# Altium PCB Sensor_Box_CAN_SENS.PCBDOC (part 2 of 2)
Units mm, origin at the board's own origin, x right, y up, seen from the top; angles counter-clockwise.
Board outline 78 x 49 mm, 2 copper layers (Top, Bot), stack 1.571 mm thick; 70 components, 54 nets, 293 pads, 158 vias.
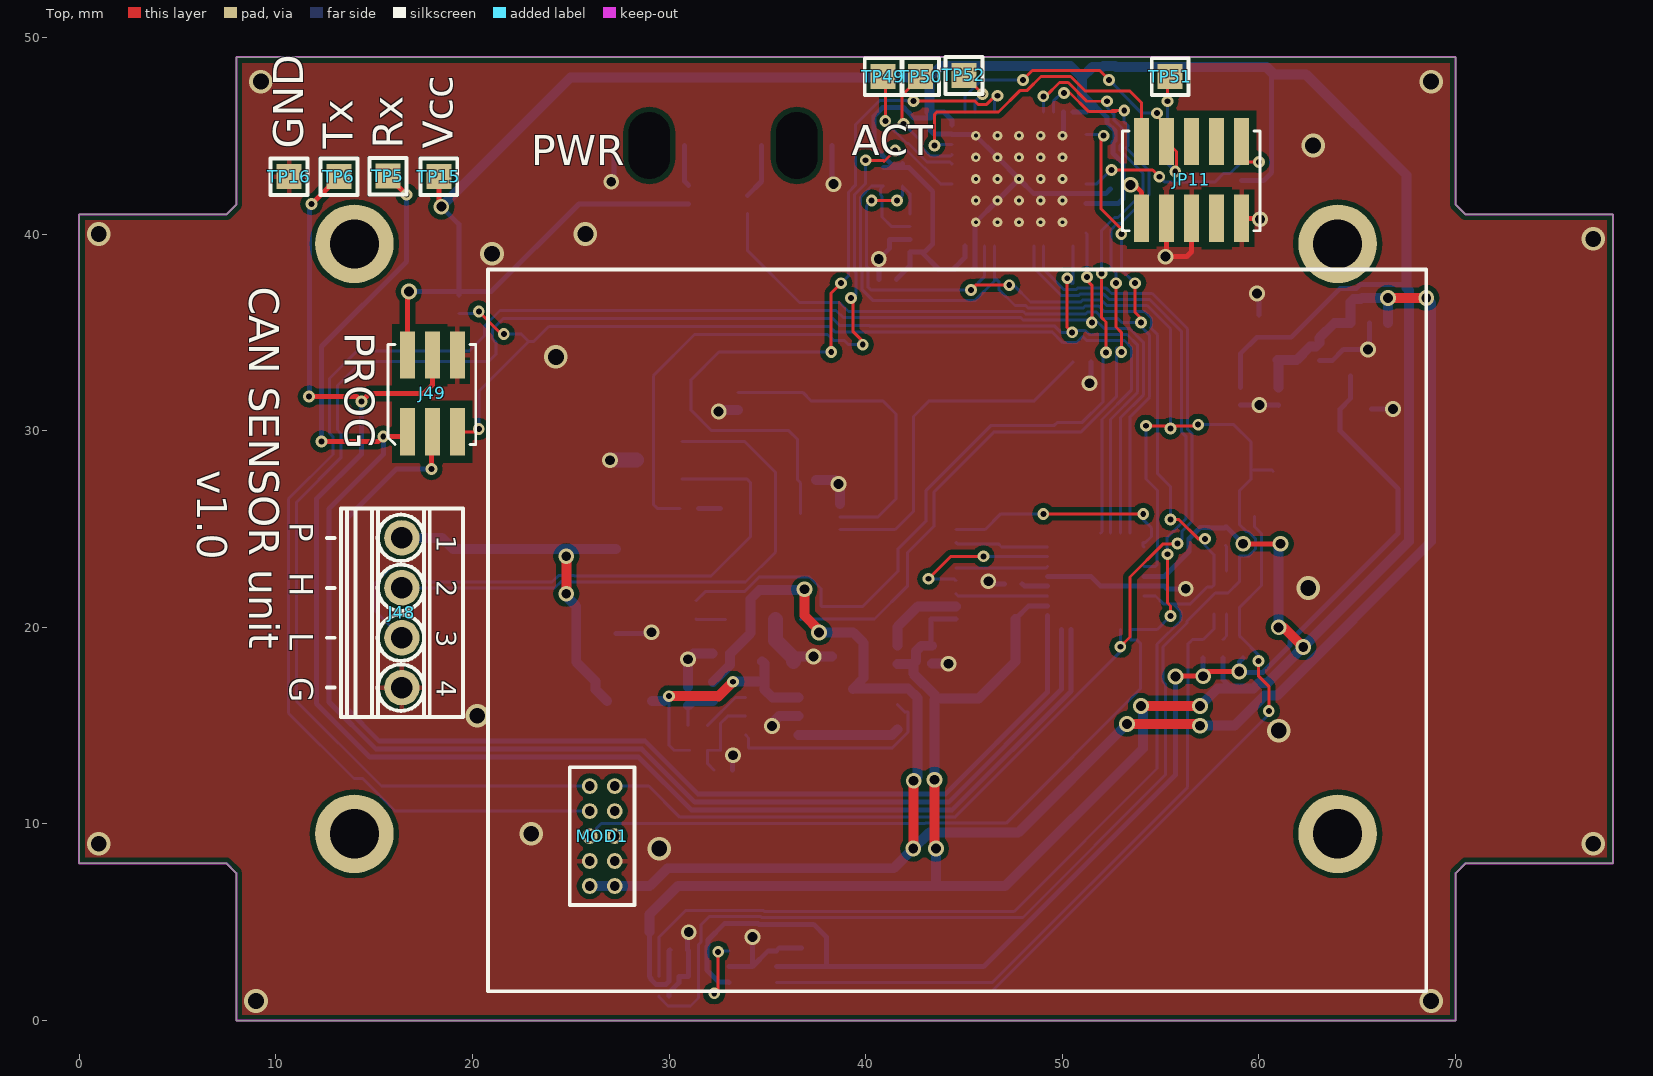
[diagram p0: Top view]

## Via types
v1: diameter 0.6, hole 0.3, Top to Bot, tented both sides, 69 vias
v2: diameter 0.8, hole 0.5, Top to Bot, tented both sides, 47 vias
v3: diameter 0.5, hole 0.2, Top to Bot, tented both sides, 25 vias
v4: diameter 1.2, hole 0.8, Top to Bot, tented both sides, 17 vias

## Nets (pads, with @x,y where several pads share a name; then routed paths per layer and width w, separated by ;. In a path a pad name is that pad's centre, name@x,y a point inside that pad or via, vN(x,y) a via of type N, cw(c..) or ccw(c..) an arc to the next point about the centre after c; other vN are vias at no path point) (continued)
PROG_MISO: (continued)
  Top w0.254: v1(12.33,29.453) 15.215,29.453 v1(15.469,29.707) 16.464,29.707 J49.1 ; TP5.1 v1(16.648,42.001)
  Bot w0.254: v1(12.33,29.453) 12.33,34.279 16.648,38.597 v1(16.648,42.001) ; v1(15.469,29.707) 15.471,29.705 15.471,28.784 12.711,26.024 12.711,16.202 15.106,13.807 28.619,13.807 31.317,11.108 44.217,11.108 49.95,16.841 IC38.16
PROG_MOSI: IC38.15 J49.4 TP6.1 | length 82.6
  Top w0.254: v1(11.695,31.739) 14.108,31.739 v1(14.362,31.485) 14.768,31.891 17.534,31.891 17.969,32.326 J49.4 ; v1(11.822,41.518) TP6.1
  Bot w0.254: v1(11.695,31.739) 11.721,31.765 11.721,41.417 v1(11.822,41.518) ; v1(14.362,31.485) 14.362,28.818 12.076,26.532 12.076,16.118 14.794,13.4 28.45,13.4 31.149,10.701 44.385,10.701 50.45,16.767 IC38.15
PROG_SCK: IC38.17 J49.3 | length 60.4
  Top w0.254: v1(17.918,28.056) 17.918,29.891 J49.3
  Bot w0.254: v1(17.918,28.056) 16.14,28.056 13.618,25.534 13.618,15.87 15.275,14.213 28.787,14.213 31.486,11.514 44.048,11.514 49.25,16.716 IC38.17
REL1: IC104.20
REL2: IC104.39
RESETn: IC38.29 J49.5 R138.2 | length 52.6
  Top w0.152: J49.5 20.184,29.941 v1(20.331,30.088) ; v1(20.331,36.057) 21.474,34.914 v1(21.601,34.914)
  Bot w0.152: R138.2 20.242,35.968 v1(20.331,36.057) ; v1(20.331,30.088) 20.331,31.993 22.871,34.533 ; v1(21.601,34.914) 22.49,34.914 22.871,34.533 ; IC38.29 52.021,24.862 52.021,30.573 53.528,32.081 53.528,34.219 53.162,34.586 51.236,34.586 51.034,34.787 50.725,34.478 50.719,34.471 50.021,34.471 49.469,35.023 38.433,35.023 38.159,35.298 23.89,35.298 23.125,34.533 22.871,34.533
Rx: IC104.38 TP52.1 | length 2.4
  Top w0.152: TP52.1 v1(45.935,47.126)
  Bot w0.152: IC104.38 45.55,46.753 45.562,46.753 v1(45.935,47.126)
SCL: IC29.6 IC38.6 IC39.A1 IC104.21 R217.1 T7.1 | length 87.7
  Top w0.152: v1(55.5,25.476) 55.931,25.476 56.907,24.5 v1(57.25,24.5)
  Bot w0.152: IC39.A1 29.5,4.25 30.84,5.59 34.805,5.59 34.84,5.555 47.555,5.555 54.817,12.817 54.817,19.135 56.034,20.352 56.034,20.79 55.625,21.198 55.133,21.198 ; IC29.6 41.326,40.374 40.834,40.867 40.834,41.918 40.75,42.002 40.75,42.29 R217.1 40.298,42.44 39.733,41.874 39.733,38.229 39.823,38.139 39.823,37.165 40.359,36.628 45.574,36.628 46.55,37.605 46.55,37.8 ; IC104.21 46.55,37.8 ; IC38.6 54.74,21.591 55.133,21.198 ; v1(55.5,25.476) 55.5,27.155 54.849,27.806 54.849,34.872 54.485,35.237 54.528,35.281 54.528,35.719 54.19,36.057 52.127,36.057 51.851,36.333 51.155,36.333 51.064,36.243 48.257,36.243 48.138,36.362 47.589,36.362 46.771,37.18 46.771,37.579 46.55,37.8 ; v1(57.25,24.5) 57.25,24.157 57.699,23.708 T7.1 57.699,22.146 57.608,22.055 57.373,22.055 56.516,21.198 55.133,21.198
SCL1: IC40.6 R139.2 T7.6 | length 34.7
  Bot w0.152: IC40.6 46.45,1.95 56.371,11.871 56.371,16.26 56.399,16.288 56.399,19.166 56.615,19.382 R139.2 57.699,19.92 T7.6
SDA: D30.3 IC29.5 IC38.3 IC39.A2 IC104.22 R215.1 T7.3 | length 100.5
  Top w0.152: v1(40.305,41.699) v1(41.6,41.699) ; v1(45.355,37.157) 45.596,37.399 v1(47.3,37.399) ; v1(54.25,30.25) 56.852,30.25 v1(56.907,30.305)
  Bot w0.152: IC39.A2 29.5,1.205 29.955,0.75 31.095,0.75 31.5,1.155 31.5,3.861 31.629,3.99 31.629,4.879 32.035,5.285 34.679,5.285 34.714,5.25 48,5.25 55.25,12.5 55.25,17.111 55.121,17.24 55.121,19.009 56.338,20.226 56.338,20.308 57.78,21.75 58.429,21.75 58.999,22.32 T7.3 58.999,23.617 59.453,23.617 59.822,23.986 59.822,24.506 59.446,24.882 59.347,24.882 58.999,25.23 58.999,26.934 59.594,27.529 59.594,28.012 ; v1(40.305,41.699) 40.038,41.432 40.038,38.356 40.128,38.266 40.128,37.291 40.261,37.157 v1(45.355,37.157) 46.05,37.852 IC104.22 ; v1(41.6,41.699) 41.866,41.965 R215.1 42.25,42.056 IC29.5 ; v1(47.3,37.399) 47.532,37.399 48.383,36.547 50.938,36.547 51.028,36.638 51.977,36.638 52.253,36.362 54.317,36.362 55.5,35.179 v1(55.5,30.112) ; IC38.3 54.74,23.091 54.816,23.168 54.816,23.936 54.833,23.953 54.833,26.955 54.25,27.538 v1(54.25,30.25) ; v1(56.907,30.305) 58.722,30.305 59.594,29.433 59.594,28.012 ; D30.3 60.641,28.012 59.594,28.012
SDA1: D30.2 IC40.3 R141.2 T7.4 | length 48.3
  Top w0.152: v1(32.3,1.39) 32.5,1.59 v1(32.5,3.5) ; v1(59.968,18.295) 59.968,17.535 60.5,17.003 v1(60.5,15.75)
  Bot w0.152: v1(32.3,1.39) 32.406,1.496 46.427,1.496 60.5,15.569 v1(60.5,15.75) ; v1@32.35,3.55 IC40.3 ; D30.2 59.767,25.119 60.126,24.76 60.126,22.126 58.999,20.999 T7.4 58.999,19.576 R141.2 59.968,18.607 v1(59.968,18.295)
SENS2_Rx: IC38.31 IC104.12 MOD1.7 | length 94.1
  Top w0.152: v1(51.247,37.816) 51.247,37.651 51.5,37.399 v1(51.5,35.5)
  Bot w0.152: MOD1.7@26.173,10.657 MOD1.7 16.073,10.657 14.422,12.308 13.981,12.308 10.654,15.635 10.654,26.532 12.909,28.788 12.909,29.693 12.736,29.866 12.736,32.653 14.124,34.041 19.829,34.041 20.615,34.828 20.615,35.322 21.403,36.11 38.495,36.11 38.854,35.752 47.885,35.752 48.004,35.633 51.367,35.633 v1(51.5,35.5) ; IC104.12 51.247,40.002 v1(51.247,37.816) ; v1@51.692,35.63 52.127,35.195 53.414,35.195 54.138,34.471 54.138,31.828 52.95,30.64 IC38.31
SENS2_Set: IC38.10 IC104.16 MOD1.10 | length 59
  Top w0.152: v1(52.95,19.011) 53.445,19.506 53.445,22.565 55.126,24.246 55.839,24.246 v1(55.86,24.267)
  Bot w0.152: MOD1.10 28.967,11.927 30.548,10.346 44.532,10.346 52.95,18.764 v1(52.95,19.011) IC38.10 ; IC104.16 49.05,38.202 50.086,37.166 50.694,37.166 50.776,37.248 52.23,37.248 52.506,36.971 54.569,36.971 56.359,35.181 56.359,30.069 56.583,29.845 56.583,25.38 56.078,24.875 56.078,24.485 v1(55.86,24.267)
SENS2_Tx: IC38.30 IC104.13 MOD1.9 | length 93
  Top w0.152: v1(50.25,37.75) 50.25,35.25 v1(50.5,35)
  Bot w0.152: MOD1.9@25.97,12.105 MOD1.9 15.378,11.927 11.06,16.245 11.06,26.364 13.316,28.619 13.316,29.861 13.143,30.034 13.143,32.298 14.362,33.517 20.839,33.517 21.195,33.873 21.195,34.501 21.022,34.674 21.022,35.154 21.572,35.704 38.327,35.704 38.673,35.358 39.827,35.358 40.174,35.358 40.203,35.328 49.596,35.328 49.924,35 v1(50.5,35) 50.592,35.092 51.161,35.092 51.362,34.89 53.288,34.89 53.833,34.345 53.833,31.954 52.45,30.571 IC38.30 ; v1(50.25,37.75) 50.25,37.721 50.5,37.471 50.55,37.521 IC104.13
SENS_RESET: IC38.9 IC104.17 MOD1.5 | length 62
  Top w0.152: v1(55.345,23.717) 55.345,21.25 55.505,21.09 v1(55.505,20.571)
  Bot w0.152: MOD1.5 25.97,9.438 26.56,10.028 43.025,10.028 43.038,10.041 47.147,10.041 53.967,16.861 53.967,19.185 53.788,19.364 53.479,19.364 53.479,19.862 IC38.9 54.825,19.891 v1(55.505,20.571) ; IC104.17 48.55,38.271 49.96,36.861 50.82,36.861 50.902,36.943 52.103,36.943 52.38,36.667 54.443,36.667 56.048,35.062 56.048,29.949 56.278,29.719 56.278,25.506 55.314,24.542 55.314,24.031 55.345,24 v1(55.345,23.717)
SWCLK: IC104.37 JP11.4 R441.1 | length 16.6
  Top w0.152: v1(48,47.837) 48.472,48.309 51.908,48.309 v1(52.38,47.837) ; v1(54.81,46.145) 54.81,46.003 55.305,45.509 JP11.4 55.805,44.2 55.805,43.247 v1(55.743,43.185)
  Bot w0.152: IC104.37 45.05,46.989 45.899,47.837 v1(48,47.837) ; v1(52.38,47.837) 52.903,47.314 52.903,47.279 54.037,46.145 v1(54.81,46.145) ; R441.1 55.305,43.623 v1(55.743,43.185)
SWDIO: IC104.34 JP11.2 | length 16.4
  Top w0.152: v1(43.5,44.5) 43.5,46.088 43.611,46.199 46.751,46.199 47.86,47.309 48.219,47.309 48.915,48.004 50.424,48.004 51.15,47.279 53.421,47.279 54.035,46.664 JP11.2
  Bot w0.152: v1(43.5,44.5) 43.549,44.549 IC104.34
Tx: R441.2 TP51.1 | length 2.9
  Top w0.152: v1(55.345,46.75) 55.345,47.862 TP51.1
  Bot w0.152: R441.2 55.339,45.204 55.339,46.744 v1(55.345,46.75)
pads on no net: D30.1 IC35.3 IC35.4 IC35.5 IC35.6 IC35.7 IC35.11 IC35.12 IC35.15 IC37.4 IC38.2 IC38.7 IC38.8 IC38.11 IC38.12 IC38.13 IC38.14 IC38.25 IC38.26 IC38.27 IC38.28 IC39.C2 IC39.D2 IC104.1 IC104.3 IC104.4 IC104.5 IC104.6 IC104.10 IC104.11 IC104.14 IC104.15 IC104.18 IC104.19 IC104.25 IC104.26 IC104.27 IC104.28 IC104.29 IC104.31 IC104.41 IC104.42 IC104.43 IC104.44 JP11.6 JP11.7 JP11.8 LD10.3 LD13.3 MOD1.6 MOD1.8

## Polygon pours and split planes (outlines as drawn)
GND on Top "Signal Layer 1-No Net 1" (solid, remove dead copper, pour order 0): 8,49 8.25,48.75 70,48.75 70,41.5 70.5,41 78,41 78,8.25 77.75,8 70.5,8 70,7.5 70,0 8.25,0 8,0.25 8,7.5 7.5,8 0,8 0,40.75 0.25,41 7.5,41 8,41.5
GND on Bot "Signal Layer 1-No Net 1" (solid, remove dead copper, pour order 2): 8,49 8.25,48.75 70,48.75 70,41.5 70.5,41 78,41 78,8.25 77.75,8 70.5,8 70,7.5 70,0 8.25,0 8,0.25 8,7.5 7.5,8 0,8 0,40.75 0.25,41 7.5,41 8,41.5

## Keep-outs
KeepOutLayer:
  lines w0.1: 0,8 0,41 7.5,41 8,41.5 8,49 70,49 70,41.5 70.5,41 78,41 78,8 70.5,8 70,7.5 70,0 8,0 8,7.5 7.5,8 0.25,8 0,8

## Silkscreen, mask and mechanical layers (free items; w line width, h text height)
TopOverlay:
  text "GND" at 11.39,44.328 h1.52 r90
  text "Tx" at 13.93,44.328 h1.52 r90
  text "Rx" at 16.47,44.328 h1.52 r90
  text "Vcc" at 19.01,44.328 h1.52 r90
  text "ACT" at 39.3,44 h1.52
  text "PWR" at 23,43.5 h1.52
  text "CAN SENSOR unit" at 8.647,37.327 h1.52 r270
  text "PROG" at 13.5,35 h1.52 r270
  text "v1.0" at 6,28 h1.52 r270
  text "P" at 10.728,25.338 h1.2 r270
  text "H" at 10.728,22.798 h1.2 r270
  text "L" at 10.728,19.75 h1.2 r270
  text "G" at 10.728,17.464 h1.2 r270
Mechanical1:
  lines w0.254: 8,41.5 7.5,41 0,41 0,8 7.5,8 8,7.5 8,0 70,0 70,7.5 70.5,8 78,8 78,41 70.5,41 70,41.5 70,49 8,49 8,41.5 ; 8,41.5 8,41.5
Mechanical4:
  circle w0.254: c4.5,44.5 r3
  circle w0.254: c73.5,44.5 r3
  circle w0.254: c73.5,4.5 r3
  circle w0.254: c4.5,4.5 r3
  circle w0.013: c86.5,13.1 r1.65
  circle w0.013: c86.5,13.1 r3.4
  circle w0.013: c-8.5,13.1 r1.65
  circle w0.013: c-8.5,13.1 r3.4
  circle w0.013: c86.5,35.9 r1.65
  circle w0.013: c86.5,35.9 r3.4
  circle w0.013: c-8.5,35.9 r1.65
  circle w0.013: c-8.5,35.9 r3.4
  lines w0.013: -0.437,-2.35 -9.439,-2.35 cw(c-9.439,0.15) -11.851,-0.506 -15.162,11.678 cw(c-12.75,12.334) -15.25,12.334 -15.25,36.666 cw(c-12.75,36.666) -15.162,37.322 -11.851,49.506 cw(c-9.439,48.85) -9.439,51.35 -0.437,51.35 ; 78.437,-2.35 87.439,-2.35 ccw(c87.439,0.15) 89.851,-0.506 93.162,11.678 ccw(c90.75,12.334) 93.25,12.334 93.25,36.666 ccw(c90.75,36.666) 93.162,37.322 89.851,49.506 ccw(c87.439,48.85) 87.439,51.35 78.437,51.35 ; -2.5,0.5 ccw(c0.5,0.5) 0.5,-2.5 ; -2.5,0.5 -2.5,48.5 ; -2.5,0.5 -2.032,0.5 ; -2.5,48.5 cw(c0.5,48.5) 0.5,51.5 ; -2.5,48.5 -2.032,48.5 ; -2.032,0.5 ccw(c0.5,0.5) 0.5,-2.032 ; -2.032,0.5 -2.032,48.5 ; -2.032,0.5 -0.532,0.5 ; -2.032,48.5 cw(c0.5,48.5) 0.5,51.032 ; -2.032,48.5 -0.532,48.5 ; -0.532,0.5 ccw(c0.5,0.5) 0.5,-0.532 ; -0.532,0.5 -0.532,48.5 ; -0.532,48.5 cw(c0.5,48.5) 0.5,49.532 ; 0.5,-2.5 77.5,-2.5 ; 0.5,-2.5 0.5,-2.032 ; 0.5,-2.032 77.5,-2.032 ; 0.5,-2.032 0.5,-0.532 ; 0.5,-0.532 77.5,-0.532 ; 0.5,49.532 77.5,49.532 ; 0.5,49.532 0.5,51.032 ; 0.5,51.032 77.5,51.032 ; 0.5,51.032 0.5,51.5 ; 0.5,51.5 77.5,51.5 ; 77.5,-2.5 ccw(c77.5,0.5) 80.5,0.5 ; 77.5,-2.5 77.5,-2.032 ; 77.5,-2.032 ccw(c77.5,0.5) 80.032,0.5 ; 77.5,-2.032 77.5,-0.532 ; 77.5,-0.532 ccw(c77.5,0.5) 78.532,0.5 ; 77.5,49.532 cw(c77.5,48.5) 78.532,48.5 ; 77.5,49.532 77.5,51.032 ; 77.5,51.032 cw(c77.5,48.5) 80.032,48.5 ; 77.5,51.032 77.5,51.5 ; 77.5,51.5 cw(c77.5,48.5) 80.5,48.5 ; 78.532,0.5 78.532,48.5 ; 78.532,0.5 80.032,0.5 ; 78.532,48.5 80.032,48.5 ; 80.032,0.5 80.032,48.5 ; 80.032,0.5 80.5,0.5 ; 80.032,48.5 80.5,48.5 ; 80.5,0.5 80.5,48.5 ; -10.5,22.2 ccw(c-8.5,22.2) -6.5,22.2 -6.5,26.8 ccw(c-8.5,26.8) -10.5,26.8 -10.5,22.2 ; 84.5,22.2 ccw(c86.5,22.2) 88.5,22.2 88.5,26.8 ccw(c86.5,26.8) 84.5,26.8 84.5,22.2

## Text inside footprints (layer, text, board x,y; h text height)
J48: TopOverlay "4" at 18.196,17.312 h1 r270; TopOverlay "1" at 18.196,24.678 h1 r270; TopOverlay "2" at 18.196,22.392 h1 r270; TopOverlay "3" at 18.196,19.852 h1 r270